# Altium PCB PCB2.PcbDoc (part 4 of 5)
Units mil, origin at the board's own origin, x right, y up, seen from the top; angles counter-clockwise.
Board outline 6000 x 4000 mil, 2 copper layers (Top Layer, Bottom Layer); 109 components, 117 nets, 490 pads, 96 vias.
Unrouted connection lines stored in the file: 3.
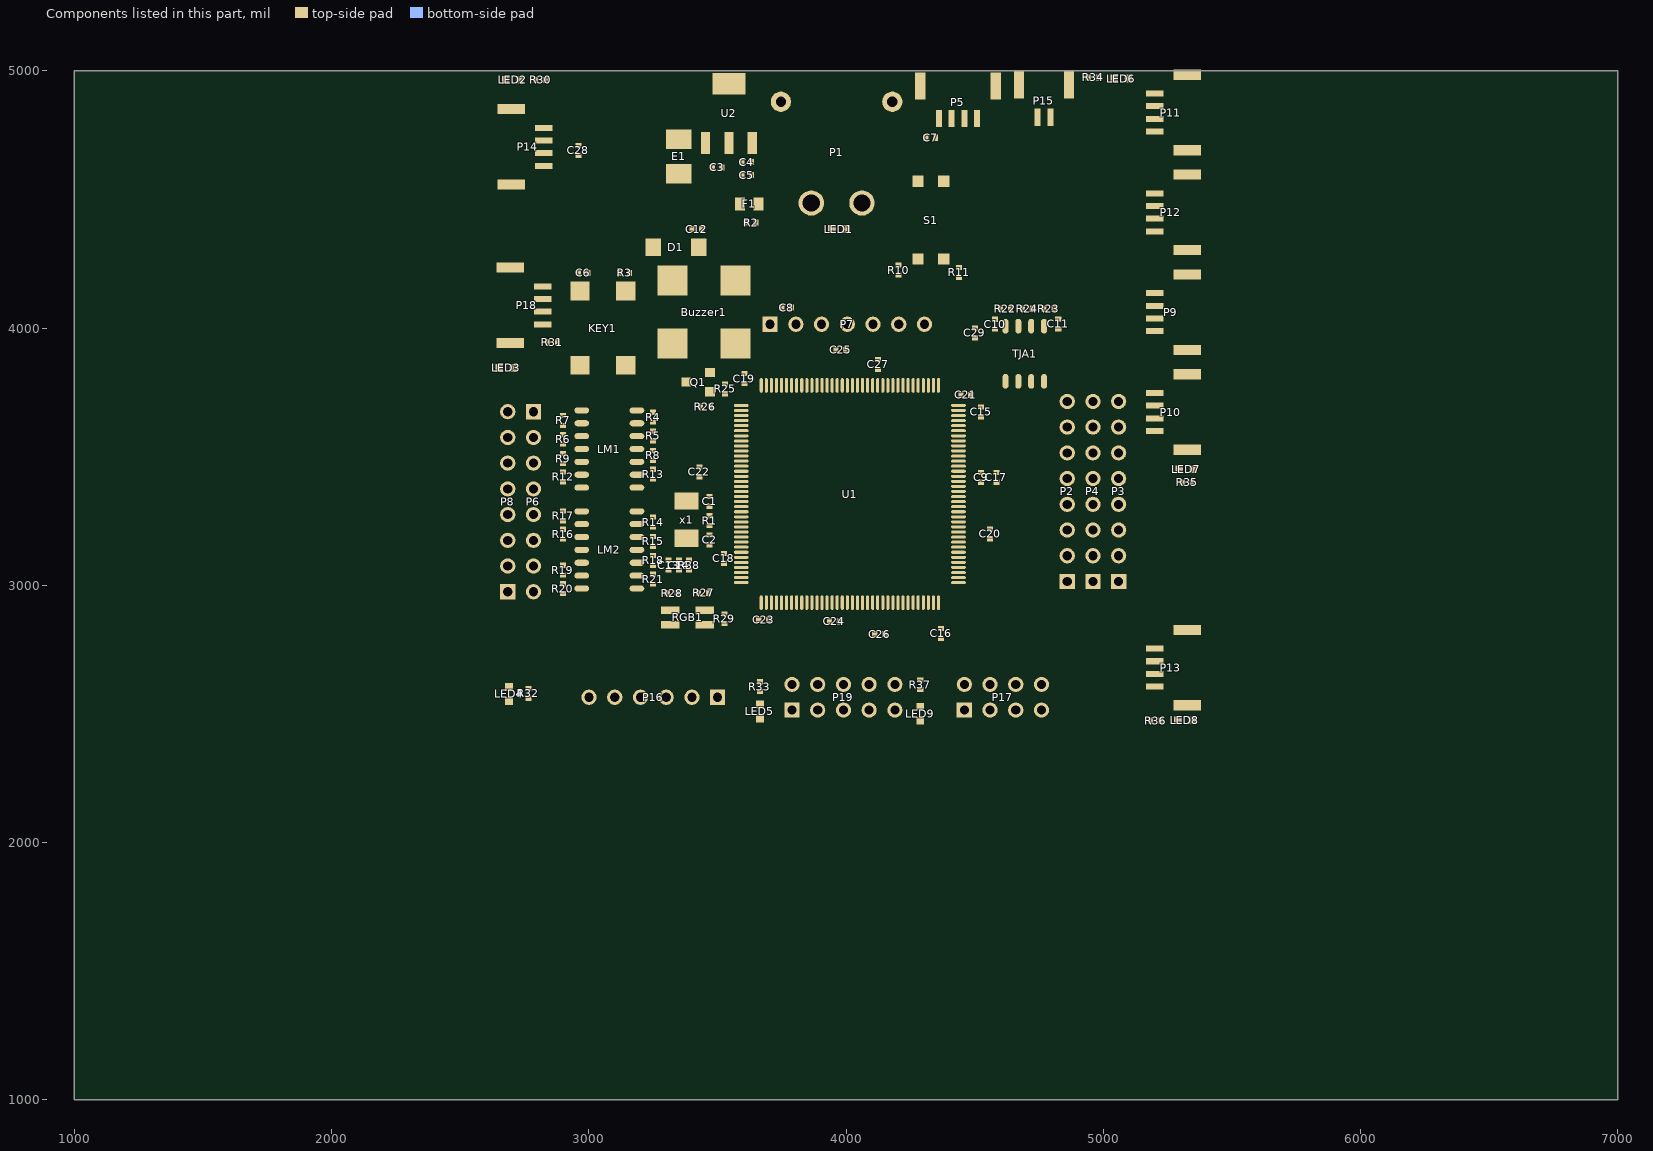
[diagram p4: the components of this part, seen from the top]

## Via types
v1: diameter 19.68, hole 11.81, Top Layer to Bottom Layer, tented both sides, 64 vias
v2: diameter 39, hole 30, Top Layer to Bottom Layer, tented both sides, 17 vias
v3: diameter 30, hole 20, Top Layer to Bottom Layer, tented both sides, 15 vias

## Nets (pads, with @x,y where several pads share a name; then routed paths per layer and width w, separated by ;. In a path a pad name is that pad's centre, name@x,y a point inside that pad or via, vN(x,y) a via of type N, cw(c..) or ccw(c..) an arc to the next point about the centre after c; other vN are vias at no path point) (continued)
copper on no net: (continued)
  Top Layer w1: 3881.33,2294 4133.67,2294 ; 3881.33,2295 4133.67,2295 ; 3882.33,2296 4132.67,2296 ; 3882.33,2297 4132.67,2297 ; 3882.33,2298 4131.67,2298 ; 3883.33,2299 4131.67,2299 ; 3883.33,2300 4130.67,2300 ; 3883.33,2301 4130.67,2301 ; 3883.33,2302 4129.67,2302 ; 3884.33,2303 4129.67,2303 ; 3884.33,2304 4128.67,2304 ; 3884.33,2305 4127.67,2305 ; 3884.33,2306 4127.67,2306 ; 3884.33,2307 4126.67,2307 ; 3885.33,2308 4125.67,2308 ; 3885.33,2309 4124.67,2309 ; 3885.33,2310 4124.67,2310 ; 3886.33,2311 4123.67,2311 ; 3886.33,2312 4122.67,2312 ; 3886.33,2313 4121.67,2313 ; 3886.33,2314 4120.67,2314 ; 3887.33,2315 4119.67,2315 ; 3887.33,2316 4118.67,2316 ; 3887.33,2317 4117.67,2317 ; 3887.33,2318 4116.67,2318 ; 3888.33,1961 3903.67,1961 ; 3888.33,2319 4115.67,2319 ; 3888.33,2320 4114.67,2320 ; 3888.33,2321 4113.67,2321 ; 3888.33,2322 4112.67,2322 ; 3889.33,1959 3903.67,1959 ; 3889.33,1960 3903.67,1960 ; 3889.33,1971 3903.67,1971 ; 3889.33,1972 3903.67,1972 ; 3889.33,1973 3903.67,1973 ; 3889.33,1974 3903.67,1974 ; 3889.33,1975 3903.67,1975 ; 3889.33,1976 3903.67,1976 ; 3889.33,1977 3903.67,1977 ; 3889.33,1978 3903.67,1978 ; 3889.33,1979 3903.67,1979 ; 3889.33,1989 3901.67,1989 ; 3889.33,2323 4111.67,2323 ; 3889.33,2324 4109.67,2324 ; 3889.33,2325 4108.67,2325 ; 3890.33,1990 3899.67,1990 ; 3890.33,2326 4107.67,2326 ; 3890.33,2327 4105.67,2327 ; 3890.33,2328 4103.67,2328 ; 3890.33,2329 4101.67,2329 ; 3891.33,1991 3897.67,1991 ; 3891.33,1992 3896.67,1992 ; 3891.33,2330 4099.67,2330 ; 3891.33,2331 4095.67,2331 ; 3892.33,1993 3894.67,1993 ; 3899.33,2027 3909.67,2027 ; 3900.33,2028 3907.67,2028 ; 3901.33,2029 3906.67,2029 ; 3902.33,1946 3915.67,1946 ; 3902.33,2030 3905.67,2030 ; 3902.33,2031 3903.67,2031 ; 3903.33,1947 3914.67,1947 ; 3904.33,1948 3913.67,1948 ; 3904.33,1949 3913.67,1949 ; 3905.33,1950 3912.67,1950 ; 3905.33,1951 3912.67,1951 ; 3905.33,1952 3912.67,1952 ; 3905.33,2005 3916.67,2005 ; 3906.33,1953 3912.67,1953 ; 3906.33,1954 3912.67,1954 ; 3906.33,1955 3912.67,1955 ; 3906.33,2006 3914.67,2006 ; 3907.33,1956 3912.67,1956 ; 3907.33,1957 3912.67,1957 ; 3907.33,1958 3912.67,1958 ; 3907.33,1959 3912.67,1959 ; 3907.33,2007 3913.67,2007 ; 3907.33,2008 3912.67,2008 ; 3908.33,1960 3908.67,1960 ; 3908.33,2009 3910.67,2009 ; 3909.33,2010 3909.67,2010 ; 3921.33,2064 3991.67,2064 ; 3921.33,2065 3991.67,2065 ; 3922.33,2066 3992.67,2066 ; 3922.33,2067 3992.67,2067 ; 3922.33,2068 3992.67,2068 ; 3922.33,2069 3992.67,2069 ; 3923.33,2070 3993.67,2070 ; 3923.33,2071 3993.67,2071 ; 3923.33,2072 3993.67,2072 ; 3924.33,2073 3993.67,2073 ; 3924.33,2074 3994.67,2074 ; 3924.33,2075 3994.67,2075 ; 3924.33,2076 3994.67,2076 ; 3925.33,2077 3994.67,2077 ; 3925.33,2078 3995.67,2078 ; 3925.33,2079 3995.67,2079 ; 3925.33,2080 3995.67,2080 ; 3926.33,2081 3996.67,2081 ; 3926.33,2082 3996.67,2082 ; 3926.33,2083 3996.67,2083 ; 3927.33,2084 3996.67,2084 ; 3927.33,2085 3997.67,2085 ; 3927.33,2086 3997.67,2086 ; 3927.33,2087 3997.67,2087 ; 3928.33,2088 3997.67,2088 ; 3928.33,2089 3998.67,2089 ; 3928.33,2090 3998.67,2090 ; 3928.33,2091 3998.67,2091 ; 3929.33,2092 3999.67,2092 ; 3929.33,2093 3999.67,2093 ; 3929.33,2094 3999.67,2094 ; 3929.33,2095 3999.67,2095 ; 3930.33,2096 4000.67,2096 ; 3930.33,2097 4000.67,2097 ; 3930.33,2098 4000.67,2098 ; 3931.33,1978 3967.67,1978 ; 3931.33,1979 3969.67,1979 ; 3931.33,2099 4000.67,2099 ; 3931.33,2100 4001.67,2100 ; 3931.33,2101 4001.67,2101 ; 3931.33,2102 4001.67,2102 ; 3932.33,1975 3963.67,1975 ; 3932.33,1976 3963.67,1976 ; 3932.33,1977 3965.67,1977 ; 3932.33,2103 4001.67,2103 ; 3932.33,2104 4002.67,2104 ; 3932.33,2105 4002.67,2105 ; 3932.33,2106 4002.67,2106 ; 3933.33,1972 3963.67,1972 ; 3933.33,1973 3963.67,1973 ; 3933.33,1974 3963.67,1974 ; 3933.33,2010 3977.67,2010 ; 3933.33,2011 4032.67,2011 ; 3933.33,2012 4033.67,2012 ; 3933.33,2107 4003.67,2107 ; 3933.33,2108 4003.67,2108 ; 3933.33,2109 4003.67,2109 ; 3934.33,1969 3946.67,1969 ; 3934.33,1970 3963.67,1970 ; 3934.33,1971 3963.67,1971 ; 3934.33,1980 3971.67,1980 ; 3934.33,2004 3976.67,2004 ; 3934.33,2005 3976.67,2005 ; 3934.33,2006 3977.67,2006 ; 3934.33,2007 3978.67,2007 ; 3934.33,2008 3978.67,2008 ; 3934.33,2009 3977.67,2009 ; 3934.33,2110 4003.67,2110 ; 3934.33,2111 4004.67,2111 ; 3934.33,2112 4004.67,2112 ; 3934.33,2113 4004.67,2113 ; 3935.33,1966 3939.67,1966 ; 3935.33,1967 3942.67,1967 ; 3935.33,1968 3944.67,1968 ; 3935.33,2002 3974.67,2002 ; 3935.33,2003 3975.67,2003 ; 3935.33,2114 4004.67,2114 ; 3935.33,2115 4005.67,2115 ; 3935.33,2116 4005.67,2116 ; 3935.33,2117 4005.67,2117 ; 3936.33,1939 3963.67,1939 ; 3936.33,1940 3963.67,1940 ; 3936.33,1941 3963.67,1941 ; 3936.33,1942 3963.67,1942 ; 3936.33,1943 3963.67,1943 ; 3936.33,1944 3963.67,1944 ; 3936.33,1965 3936.67,1965 ; 3936.33,2118 4006.67,2118 ; 3936.33,2119 4006.67,2119 ; 3936.33,2120 4006.67,2120 ; 3936.33,2121 4006.67,2121 ; 3937.33,1938 3962.67,1938 ; 3937.33,2122 4007.67,2122 ; 3937.33,2123 4007.67,2123 ; 3937.33,2124 4007.67,2124 ; 3938.33,2125 4007.67,2125 ; 3938.33,2126 4008.67,2126 ; 3938.33,2127 4008.67,2127 ; 3938.33,2128 4008.67,2128 ; 3939.33,1937 3962.67,1937 ; 3939.33,1981 3973.67,1981 ; 3939.33,2129 4008.67,2129 ; 3939.33,2130 4009.67,2130 ; 3939.33,2131 4009.67,2131 ; 3939.33,2132 4009.67,2132 ; 3940.33,2133 4010.67,2133 ; 3940.33,2134 4010.67,2134 ; 3940.33,2135 4010.67,2135 ; 3941.33,2136 4010.67,2136 ; 3941.33,2137 4011.67,2137 ; 3941.33,2138 4011.67,2138 ; 3941.33,2139 4011.67,2139 ; 3942.33,2140 4011.67,2140 ; 3942.33,2141 4012.67,2141 ; 3942.33,2142 4012.67,2142 ; 3942.33,2143 4012.67,2143 ; 3943.33,1936 3961.67,1936 ; 3943.33,2144 4013.67,2144 ; 3943.33,2145 4013.67,2145 ; 3943.33,2146 4013.67,2146 ; 3943.33,2147 4013.67,2147 ; 3944.33,1935 3961.67,1935 ; 3944.33,1945 3963.67,1945 ; 3944.33,1982 3973.67,1982 ; 3944.33,2148 4014.67,2148 ; 3944.33,2149 4014.67,2149 ; 3944.33,2150 4014.67,2150 ; 3945.33,1934 3960.67,1934 ; 3945.33,2151 4014.67,2151 ; 3945.33,2152 4015.67,2152 ; 3945.33,2153 4015.67,2153 ; 3945.33,2154 4015.67,2154 ; 3946.33,1930 3951.67,1930 ; 3946.33,1931 3955.67,1931 ; 3946.33,1932 3957.67,1932 ; 3946.33,1933 3959.67,1933 ; 3946.33,2155 4015.67,2155 ; 3946.33,2156 4016.67,2156 ; 3946.33,2157 4016.67,2157 ; 3946.33,2158 4016.67,2158 ; 3947.33,1946 3963.67,1946 ; 3947.33,2159 4017.67,2159 ; 3947.33,2160 4017.67,2160 ; 3947.33,2161 4017.67,2161 ; 3948.33,1947 3963.67,1947 ; 3948.33,1948 3963.67,1948 ; 3948.33,1950 3963.67,1950 ; 3948.33,1951 3963.67,1951 ; 3948.33,1952 3963.67,1952 ; 3948.33,1953 3963.67,1953 ; 3948.33,1954 3963.67,1954 ; 3948.33,1955 3963.67,1955 ; 3948.33,1956 3963.67,1956 ; 3948.33,1957 3963.67,1957 ; 3948.33,1958 3963.67,1958 ; 3948.33,1959 3963.67,1959 ; 3948.33,1960 3963.67,1960 ; 3948.33,1961 3963.67,1961 ; 3948.33,1962 3963.67,1962 ; 3948.33,1963 3963.67,1963 ; 3948.33,1964 3963.67,1964 ; 3948.33,1965 3963.67,1965 ; 3948.33,1966 3963.67,1966 ; 3948.33,1967 3963.67,1967 ; 3948.33,1968 3963.67,1968 ; 3948.33,1969 3963.67,1969 ; 3948.33,1983 3973.67,1983 ; 3948.33,1984 3973.67,1984 ; 3948.33,1985 3973.67,1985 ; 3948.33,1986 3973.67,1986 ; 3948.33,1987 3963.67,1987 ; 3948.33,1988 3963.67,1988 ; 3948.33,1989 3963.67,1989 ; 3948.33,1990 3963.67,1990 ; 3948.33,1991 3963.67,1991 ; 3948.33,1992 3963.67,1992 ; 3948.33,1993 3963.67,1993 ; 3948.33,1994 3963.67,1994 ; 3948.33,1995 3963.67,1995 ; 3948.33,1996 3963.67,1996 ; 3948.33,1997 3963.67,1997 ; 3948.33,1998 3963.67,1998 ; 3948.33,1999 3963.67,1999 ; 3948.33,2000 3963.67,2000 ; 3948.33,2001 3963.67,2001 ; 3948.33,2013 3963.67,2013 ; 3948.33,2014 3963.67,2014 ; 3948.33,2015 3963.67,2015 ; 3948.33,2016 3963.67,2016 ; 3948.33,2017 3963.67,2017 ; 3948.33,2018 3963.67,2018 ; 3948.33,2019 3963.67,2019 ; 3948.33,2020 3963.67,2020 ; 3948.33,2021 3963.67,2021 ; 3948.33,2022 3963.67,2022 ; 3948.33,2023 3963.67,2023 ; 3948.33,2024 3963.67,2024 ; 3948.33,2025 3963.67,2025 ; 3948.33,2026 3963.67,2026 ; 3948.33,2027 3963.67,2027 ; 3948.33,2028 3963.67,2028 ; 3948.33,2029 3963.67,2029 ; 3948.33,2030 3963.67,2030 ; 3948.33,2031 3963.67,2031 ; 3948.33,2032 3963.67,2032 ; 3948.33,2033 3963.67,2033 ; 3948.33,2034 3963.67,2034 ; 3948.33,2035 3963.67,2035 ; 3948.33,2036 3963.67,2036 ; 3948.33,2037 3963.67,2037 ; 3948.33,2162 4017.67,2162 ; 3948.33,2163 4018.67,2163 ; 3948.33,2164 4018.67,2164 ; 3948.33,2165 4018.67,2165 ; 3949.33,1949 3963.67,1949 ; 3949.33,2166 4018.67,2166 ; 3949.33,2167 4019.67,2167 ; 3949.33,2168 4019.67,2168 ; 3949.33,2169 4019.67,2169 ; 3950.33,2170 4020.67,2170 ; 3950.33,2171 4020.67,2171 ; 3950.33,2172 4020.67,2172 ; 3950.33,2173 4020.67,2173 ; 3950.33,2274 4045.67,2274 ; 3951.33,2174 4021.67,2174 ; 3951.33,2175 4021.67,2175 ; 3951.33,2176 4021.67,2176 ; 3952.33,2177 4021.67,2177 ; 3952.33,2178 4022.67,2178 ; 3952.33,2179 4022.67,2179 ; 3952.33,2180 4022.67,2180 ; 3953.33,2181 4022.67,2181 ; 3953.33,2182 4023.67,2182 ; 3953.33,2183 4023.67,2183 ; 3953.33,2184 4023.67,2184 ; 3953.33,2273 4045.67,2273 ; 3954.33,2185 4024.67,2185 ; 3954.33,2186 4024.67,2186 ; 3954.33,2187 4024.67,2187 ; 3954.33,2188 4024.67,2188 ; 3955.33,2189 4025.67,2189 ; 3955.33,2190 4025.67,2190 ; 3955.33,2191 4025.67,2191 ; 3955.33,2272 4045.67,2272 ; 3956.33,2192 4025.67,2192 ; 3956.33,2193 4026.67,2193 ; 3956.33,2194 4026.67,2194 ; 3956.33,2195 4026.67,2195 ; 3957.33,2196 4026.67,2196 ; 3957.33,2197 4027.67,2197 ; 3957.33,2198 4027.67,2198 ; 3957.33,2199 4027.67,2199 ; 3957.33,2271 4045.67,2271 ; 3958.33,2200 4028.67,2200 ; 3958.33,2201 4028.67,2201 ; 3958.33,2202 4028.67,2202 ; 3958.33,2270 4045.67,2270 ; 3959.33,2203 4028.67,2203 ; 3959.33,2204 4029.67,2204 ; 3959.33,2205 4029.67,2205 ; 3959.33,2206 4029.67,2206 ; 3960.33,2207 4029.67,2207 ; 3960.33,2208 4030.67,2208 ; 3960.33,2209 4030.67,2209 ; 3960.33,2210 4030.67,2210 ; 3960.33,2269 4045.67,2269 ; 3961.33,2211 4031.67,2211 ; 3961.33,2212 4031.67,2212 ; 3961.33,2213 4031.67,2213 ; 3961.33,2214 4031.67,2214 ; 3961.33,2268 4045.67,2268 ; 3962.33,2215 4032.67,2215 ; 3962.33,2216 4032.67,2216 ; 3962.33,2217 4032.67,2217 ; 3962.33,2267 4045.67,2267 ; 3963.33,2218 4032.67,2218 ; 3963.33,2219 4033.67,2219 ; 3963.33,2220 4033.67,2220 ; 3963.33,2221 4033.67,2221 ; 3964.33,2222 4033.67,2222 ; 3964.33,2223 4034.67,2223 ; 3964.33,2224 4034.67,2224 ; 3964.33,2225 4034.67,2225 ; 3964.33,2265 4045.67,2265 ; 3964.33,2266 4045.67,2266 ; 3965.33,1987 3972.67,1987 ; 3965.33,2013 4033.67,2013 ; 3965.33,2226 4035.67,2226 ; 3965.33,2227 4035.67,2227 ; 3965.33,2228 4035.67,2228 ; 3965.33,2264 4044.67,2264 ; 3966.33,1935 3986.67,1935 ; 3966.33,2014 3971.67,2014 ; 3966.33,2015 3970.67,2015 ; 3966.33,2229 4035.67,2229 ; 3966.33,2230 4036.67,2230 ; 3966.33,2231 4036.67,2231 ; 3966.33,2232 4036.67,2232 ; 3966.33,2263 4044.67,2263 ; 3967.33,1934 3984.67,1934 ; 3967.33,1936 3988.67,1936 ; 3967.33,2016 3968.67,2016 ; 3967.33,2233 4036.67,2233 ; 3967.33,2234 4037.67,2234 ; 3967.33,2235 4037.67,2235 ; 3967.33,2236 4037.67,2236 ; 3967.33,2261 4044.67,2261 ; 3967.33,2262 4044.67,2262 ; 3968.33,1932 3979.67,1932 ; 3968.33,1933 3982.67,1933 ; 3968.33,2237 4038.67,2237 ; 3968.33,2238 4038.67,2238 ; 3968.33,2239 4038.67,2239 ; 3968.33,2240 4038.67,2240 ; 3968.33,2259 4043.67,2259 ; 3968.33,2260 4044.67,2260 ; 3969.33,1931 3976.67,1931 ; 3969.33,1937 3990.67,1937 ; 3969.33,1988 3972.67,1988 ; 3969.33,2241 4039.67,2241 ; 3969.33,2242 4039.67,2242 ; 3969.33,2243 4039.67,2243 ; 3969.33,2257 4043.67,2257 ; 3969.33,2258 4043.67,2258 ; 3970.33,1929 3970.67,1929 ; 3970.33,1930 3973.67,1930 ; 3970.33,2244 4039.67,2244 ; 3970.33,2245 4040.67,2245 ; 3970.33,2246 4040.67,2246 ; 3970.33,2247 4040.67,2247 ; 3970.33,2253 4042.67,2253 ; 3970.33,2254 4042.67,2254 ; 3970.33,2255 4042.67,2255 ; 3970.33,2256 4043.67,2256 ; 3971.33,1938 3992.67,1938 ; 3971.33,2248 4040.67,2248 ; 3971.33,2249 4041.67,2249 ; 3971.33,2250 4041.67,2250 ; 3971.33,2251 4041.67,2251 ; 3971.33,2252 4042.67,2252 ; 3972.33,2020 4034.67,2020 ; 3972.33,2021 4032.67,2021 ; 3973.33,1939 3994.67,1939 ; 3973.33,2014 4034.67,2014 ; 3973.33,2015 4035.67,2015 ; 3973.33,2016 4035.67,2016 ; 3973.33,2017 4036.67,2017 ; 3973.33,2018 4036.67,2018 ; 3973.33,2019 4035.67,2019 ; 3975.33,1940 3995.67,1940 ; 3975.33,1992 4030.67,1992 ; 3975.33,1993 4028.67,1993 ; 3975.33,1994 4027.67,1994 ; 3976.33,1941 3997.67,1941 ; 3976.33,1986 4030.67,1986 ; 3976.33,1987 4030.67,1987 ; 3976.33,1988 4031.67,1988 ; 3976.33,1989 4032.67,1989 ; 3976.33,1990 4032.67,1990 ; 3976.33,1991 4031.67,1991 ; 3977.33,1984 4028.67,1984 ; 3977.33,1985 4029.67,1985 ; 3978.33,1942 3998.67,1942 ; 3980.33,1943 4000.67,1943 ; 3981.33,1944 4001.67,1944 ; 3982.33,1983 3993.67,1983 ; 3983.33,1945 4038.67,1945 ; 3983.33,1979 3994.67,1979 ; 3983.33,1980 3994.67,1980 ; 3983.33,1981 3993.67,1981 ; 3983.33,1982 3993.67,1982 ; 3984.33,1946 4039.67,1946 ; 3984.33,1976 3996.67,1976 ; 3984.33,1977 3995.67,1977 ; 3984.33,1978 3995.67,1978 ; 3985.33,1973 3998.67,1973 ; 3985.33,1974 3997.67,1974 ; 3985.33,1975 3996.67,1975 ; 3986.33,1947 4037.67,1947 ; 3986.33,1970 4000.67,1970 ; 3986.33,1971 3999.67,1971 ; 3986.33,1972 3998.67,1972 ; 3987.33,1948 4034.67,1948 ; 3987.33,1968 4001.67,1968 ; 3987.33,1969 4000.67,1969 ; 3988.33,1949 4031.67,1949 ; 3988.33,1965 4019.67,1965 ; 3988.33,1966 4020.67,1966 ; 3988.33,1967 4002.67,1967 ; 3989.33,1963 4018.67,1963 ; 3989.33,1964 4019.67,1964 ; 3990.33,1950 4029.67,1950 ; 3990.33,1961 4017.67,1961 ; 3990.33,1962 4017.67,1962 ; 3991.33,1951 4026.67,1951 ; 3991.33,1959 4015.67,1959 ; 3991.33,1960 4016.67,1960 ; 3992.33,1952 4024.67,1952 ; 3992.33,1958 4015.67,1958 ; 3993.33,1953 4022.67,1953 ; 3993.33,1956 4016.67,1956 ; 3993.33,1957 4014.67,1957 ; 3994.33,1954 4020.67,1954 ; 3994.33,1955 4018.67,1955 ; 3995.33,1995 4010.67,1995 ; 3995.33,1996 4009.67,1996 ; 3995.33,1997 4009.67,1997 ; 3995.33,1998 4009.67,1998 ; 3995.33,1999 4009.67,1999 ; 3995.33,2000 4009.67,2000 ; 3995.33,2001 4009.67,2001 ; 3995.33,2002 4009.67,2002 ; 3995.33,2003 4009.67,2003 ; 3995.33,2004 4009.67,2004 ; 3995.33,2005 4009.67,2005 ; 3995.33,2006 4009.67,2006 ; 3995.33,2007 4009.67,2007 ; 3995.33,2008 4009.67,2008 ; 3995.33,2009 4009.67,2009 ; 3995.33,2010 4009.67,2010 ; 3995.33,2022 4009.67,2022 ; 3995.33,2023 4009.67,2023 ; 3995.33,2024 4009.67,2024 ; 3995.33,2025 4009.67,2025 ; 3995.33,2026 4009.67,2026 ; 3995.33,2027 4009.67,2027 ; 3995.33,2028 4009.67,2028 ; 3995.33,2029 4009.67,2029 ; 3995.33,2030 4009.67,2030 ; 3995.33,2031 4009.67,2031 ; 3995.33,2032 4009.67,2032 ; 3995.33,2033 4009.67,2033 ; 3995.33,2034 4009.67,2034 ; 3995.33,2035 4009.67,2035 ; 3995.33,2036 4009.67,2036 ; 3995.33,2037 4009.67,2037 ; 4004.33,1944 4037.67,1944 ; 4004.33,1967 4020.67,1967 ; 4005.33,1943 4036.67,1943 ; 4005.33,1968 4021.67,1968 ; 4005.33,1969 4021.67,1969 ; 4006.33,1942 4036.67,1942 ; 4006.33,1970 4022.67,1970 ; 4007.33,1971 4022.67,1971 ; 4007.33,1972 4023.67,1972 ; 4008.33,1941 4035.67,1941 ; 4008.33,1973 4023.67,1973 ; 4008.33,1974 4024.67,1974 ; 4009.33,1940 4034.67,1940 ; 4009.33,1975 4024.67,1975 ; 4009.33,1976 4025.67,1976 ; 4009.33,1977 4025.67,1977 ; 4010.33,1939 4033.67,1939 ; 4010.33,1978 4026.67,1978 ; 4010.33,1979 4026.67,1979 ; 4011.33,1980 4027.67,1980 ; 4011.33,1981 4027.67,1981 ; 4011.33,1982 4027.67,1982 ; 4012.33,1938 4032.67,1938 ; 4012.33,1983 4028.67,1983 ; 4013.33,1937 4031.67,1937 ; 4013.33,1995 4025.67,1995 ; 4014.33,1996 4024.67,1996 ; 4014.33,1997 4023.67,1997 ; 4015.33,1936 4031.67,1936 ; 4015.33,1998 4021.67,1998 ; 4016.33,1935 4030.67,1935 ; 4016.33,1999 4020.67,1999 ; 4016.33,2000 4018.67,2000 ; 4017.33,2001 4017.67,2001 ; 4018.33,1934 4029.67,1934 ; 4020.33,1933 4028.67,1933 ; 4021.33,2022 4031.67,2022 ; 4022.33,1932 4028.67,1932 ; 4022.33,2023 4030.67,2023 ; 4023.33,2024 4028.67,2024 ; 4023.33,2025 4027.67,2025 ; 4024.33,1931 4027.67,1931 ; 4024.33,2026 4025.67,2026 ; 4024.33,2027 4024.67,2027 ; 4025.33,1930 4026.67,1930 ; 4046.33,1960 4055.67,1960 ; 4047.33,1959 4054.67,1959 ; 4047.33,1961 4056.67,1961 ; 4047.33,1962 4056.67,1962 ; 4048.33,1963 4057.67,1963 ; 4048.33,1964 4058.67,1964 ; 4049.33,1958 4053.67,1958 ; 4049.33,1965 4058.67,1965 ; 4049.33,1966 4059.67,1966 ; 4049.33,2005 4094.67,2005 ; 4049.33,2006 4095.67,2006 ; 4049.33,2007 4095.67,2007 ; 4049.33,2008 4094.67,2008 ; 4049.33,2009 4093.67,2009 ; 4049.33,2010 4092.67,2010 ; 4049.33,2011 4090.67,2011 ; 4050.33,1967 4060.67,1967 ; 4050.33,1968 4060.67,1968 ; 4050.33,2002 4092.67,2002 ; 4050.33,2003 4093.67,2003 ; 4050.33,2004 4094.67,2004 ; 4051.33,1957 4053.67,1957 ; 4051.33,1969 4061.67,1969 ; 4051.33,1970 4062.67,1970 ; 4052.33,1956 4052.67,1956 ; 4052.33,1971 4062.67,1971 ; 4052.33,1972 4063.67,1972 ; 4053.33,1973 4079.67,1973 ; 4053.33,1974 4079.67,1974 ; 4054.33,1975 4079.67,1975 ; 4054.33,1976 4079.67,1976 ; 4054.33,1977 4079.67,1977 ; 4055.33,1978 4079.67,1978 ; 4055.33,1979 4079.67,1979 ; 4056.33,1980 4079.67,1980 ; 4056.33,1981 4079.67,1981 ; 4056.33,1982 4079.67,1982 ; 4057.33,1983 4079.67,1983 ; 4057.33,1984 4094.67,1984 ; 4057.33,1985 4092.67,1985 ; 4058.33,1986 4091.67,1986 ; 4058.33,1987 4090.67,1987 ; 4059.33,1988 4089.67,1988 ; 4059.33,1989 4088.67,1989 ; 4059.33,1990 4087.67,1990 ; 4059.33,1991 4086.67,1991 ; 4060.33,1992 4084.67,1992 ; 4060.33,1993 4083.67,1993 ; 4060.33,1994 4082.67,1994 ; 4061.33,1995 4081.67,1995 ; 4061.33,1996 4079.67,1996 ; 4061.33,1997 4079.67,1997 ; 4061.33,1998 4079.67,1998 ; 4062.33,1999 4079.67,1999 ; 4062.33,2000 4079.67,2000 ; 4062.33,2001 4079.67,2001 ; 4064.33,2012 4079.67,2012 ; 4065.33,1930 4079.67,1930 ; 4065.33,1931 4079.67,1931 ; 4065.33,1932 4079.67,1932 ; 4065.33,1933 4079.67,1933 ; 4065.33,1934 4079.67,1934 ; 4065.33,1935 4091.67,1935 ; 4065.33,1936 4079.67,1936 ; 4065.33,1937 4079.67,1937 ; 4065.33,1938 4079.67,1938 ; 4065.33,1939 4079.67,1939 ; 4065.33,1940 4079.67,1940 ; 4065.33,1941 4079.67,1941 ; 4065.33,1942 4079.67,1942 ; 4065.33,1943 4079.67,1943 ; 4065.33,1944 4079.67,1944 ; 4065.33,1945 4079.67,1945 ; 4065.33,1946 4079.67,1946 ; 4065.33,1947 4079.67,1947 ; 4065.33,1948 4079.67,1948 ; 4065.33,1949 4079.67,1949 ; 4065.33,1950 4079.67,1950 ; 4065.33,1951 4079.67,1951 ; 4065.33,1952 4079.67,1952 ; 4065.33,1953 4079.67,1953 ; 4065.33,1954 4079.67,1954 ; 4065.33,1955 4079.67,1955 ; 4065.33,1956 4079.67,1956 ; 4065.33,1957 4079.67,1957 ; 4065.33,1958 4079.67,1958 ; 4065.33,1959 4079.67,1959 ; 4065.33,1960 4079.67,1960 ; 4065.33,1961 4079.67,1961 ; 4065.33,1962 4079.67,1962 ; 4065.33,1963 4079.67,1963 ; 4065.33,1964 4079.67,1964 ; 4065.33,1965 4079.67,1965 ; 4065.33,1966 4079.67,1966 ; 4065.33,1967 4079.67,1967 ; 4065.33,1968 4079.67,1968 ; 4065.33,1969 4079.67,1969 ; 4065.33,1970 4079.67,1970 ; 4065.33,1971 4079.67,1971 ; 4065.33,1972 4079.67,1972 ; 4065.33,2013 4079.67,2013 ; 4065.33,2014 4079.67,2014 ; 4065.33,2015 4079.67,2015 ; 4065.33,2016 4079.67,2016 ; 4065.33,2017 4079.67,2017 ; 4065.33,2018 4079.67,2018 ; 4065.33,2019 4079.67,2019 ; 4065.33,2020 4079.67,2020 ; 4065.33,2021 4079.67,2021 ; 4065.33,2022 4079.67,2022 ; 4065.33,2023 4079.67,2023 ; 4065.33,2024 4079.67,2024 ; 4065.33,2025 4079.67,2025 ; 4065.33,2026 4079.67,2026 ; 4065.33,2027 4079.67,2027 ; 4065.33,2028 4079.67,2028 ; 4065.33,2029 4079.67,2029 ; 4065.33,2030 4079.67,2030 ; 4065.33,2031 4079.67,2031 ; 4065.33,2032 4079.67,2032 ; 4065.33,2033 4079.67,2033 ; 4065.33,2034 4079.67,2034 ; 4065.33,2035 4079.67,2035 ; 4065.33,2036 4079.67,2036 ; 4081.33,1934 4090.67,1934 ; 4081.33,1936 4092.67,1936 ; 4081.33,1982 4095.67,1982 ; 4081.33,1983 4094.67,1983 ; 4081.33,2012 4089.67,2012 ; 4082.33,1937 4093.67,1937 ; 4082.33,1938 4094.67,1938 ; 4082.33,1980 4094.67,1980 ; 4082.33,1981 4094.67,1981 ; 4082.33,2013 4088.67,2013 ; 4082.33,2014 4087.67,2014 ; 4083.33,1933 4089.67,1933 ; 4083.33,1939 4095.67,1939 ; 4083.33,1978 4092.67,1978 ; 4083.33,1979 4093.67,1979 ; 4083.33,2015 4086.67,2015 ; 4084.33,1932 4088.67,1932 ; 4084.33,1940 4096.67,1940 ; 4084.33,1975 4090.67,1975 ; 4084.33,1976 4091.67,1976 ; 4084.33,1977 4092.67,1977 ; 4084.33,2016 4085.67,2016 ; 4085.33,1941 4096.67,1941 ; 4085.33,1942 4097.67,1942 ; 4085.33,1973 4088.67,1973 ; 4085.33,1974 4089.67,1974 ; 4086.33,1931 4087.67,1931 ; 4086.33,1943 4098.67,1943 ; 4086.33,1944 4099.67,1944 ; 4086.33,1972 4087.67,1972 ; 4087.33,1945 4099.67,1945 ; 4088.33,1946 4100.67,1946 ; 4088.33,1947 4101.67,1947 ; 4089.33,1948 4101.67,1948 ; 4089.33,1949 4102.67,1949 ; 4090.33,1950 4102.67,1950 ; 4090.33,1951 4103.67,1951 ; 4091.33,1952 4103.67,1952 ; 4091.33,1953 4104.67,1953 ; 4091.33,1954 4104.67,1954 ; 4092.33,1955 4105.67,1955 ; 4092.33,1956 4105.67,1956 ; 4092.33,1957 4106.67,1957 ; 4093.33,1958 4106.67,1958 ; 4093.33,1959 4106.67,1959 ; 4093.33,1960 4107.67,1960 ; 4094.33,1961 4107.67,1961 ; 4094.33,1962 4107.67,1962 ; 4094.33,1963 4108.67,1963 ; 4095.33,1964 4108.67,1964 ; 4095.33,1965 4108.67,1965 ; 4095.33,1966 4109.67,1966 ; 4095.33,1967 4109.67,1967 ; 4095.33,1968 4109.67,1968 ; 4096.33,1969 4109.67,1969 ; 4096.33,1970 4110.67,1970 ; 4096.33,1971 4110.67,1971 ; 4096.33,1972 4110.67,1972 ; 4096.33,1973 4110.67,1973 ; 4096.33,1974 4110.67,1974 ; 4097.33,1975 4110.67,1975 ; 4097.33,1976 4111.67,1976 ; 4097.33,1977 4111.67,1977 ; 4097.33,1978 4111.67,1978 ; 4097.33,1979 4111.67,1979 ; 4097.33,1980 4111.67,1980 ; 4097.33,1981 4111.67,1981 ; 4097.33,1982 4111.67,1982 ; 4097.33,1983 4111.67,1983 ; 4097.33,1984 4111.67,1984 ; 4097.33,1985 4111.67,1985 ; 4097.33,1986 4111.67,1986 ; 4097.33,1987 4111.67,1987 ; 4097.33,1988 4111.67,1988 ; 4097.33,1989 4111.67,1989 ; 4097.33,1990 4111.67,1990 ; 4097.33,1991 4111.67,1991 ; 4097.33,1992 4111.67,1992 ; 4097.33,1993 4111.67,1993 ; 4097.33,1994 4111.67,1994 ; 4097.33,1995 4111.67,1995 ; 4097.33,1996 4111.67,1996 ; 4097.33,1997 4111.67,1997 ; 4097.33,1998 4111.67,1998 ; 4097.33,1999 4111.67,1999 ; 4097.33,2000 4111.67,2000 ; 4097.33,2001 4111.67,2001 ; 4097.33,2002 4111.67,2002 ; 4097.33,2003 4111.67,2003 ; 4097.33,2004 4111.67,2004 ; 4097.33,2005 4111.67,2005 ; 4097.33,2006 4111.67,2006 ; 4097.33,2007 4111.67,2007 ; 4097.33,2008 4111.67,2008 ; 4097.33,2009 4111.67,2009 ; 4097.33,2010 4111.67,2010 ; 4097.33,2011 4111.67,2011 ; 4097.33,2012 4111.67,2012 ; 4097.33,2013 4111.67,2013 ; 4097.33,2014 4111.67,2014 ; 4097.33,2015 4111.67,2015 ; 4097.33,2016 4111.67,2016 ; 4097.33,2017 4111.67,2017 ; 4097.33,2018 4111.67,2018 ; 4097.33,2019 4112.67,2019 ; 4097.33,2020 4139.67,2020 ; 4097.33,2021 4139.67,2021 ; 4097.33,2022 4140.67,2022 ; 4097.33,2023 4141.67,2023 ; 4097.33,2024 4142.67,2024 ; 4097.33,2025 4142.67,2025 ; 4097.33,2026 4140.67,2026 ; 4097.33,2027 4139.67,2027 ; 4097.33,2028 4137.67,2028 ; 4097.33,2029 4136.67,2029 ; 4097.33,2030 4112.67,2030 ; 4097.33,2031 4111.67,2031 ; 4097.33,2032 4111.67,2032 ; 4098.33,2033 4111.67,2033 ; 4123.33,1944 4156.67,1944 ; 4123.33,1945 4157.67,1945 ; 4123.33,1946 4157.67,1946 ; 4123.33,1947 4157.67,1947 ; 4123.33,1948 4157.67,1948 ; 4123.33,1949 4157.67,1949 ; 4123.33,1950 4139.67,1950 ; 4123.33,1951 4138.67,1951 ; 4123.33,1952 4138.67,1952 ; 4123.33,1953 4138.67,1953 ; 4123.33,1954 4138.67,1954 ; 4123.33,1955 4138.67,1955 ; 4123.33,1956 4138.67,1956 ; 4123.33,1957 4138.67,1957 ; 4123.33,1958 4138.67,1958 ; 4123.33,1959 4138.67,1959 ; 4123.33,1960 4138.67,1960 ; 4123.33,1961 4138.67,1961 ; 4123.33,1962 4138.67,1962 ; 4123.33,1963 4138.67,1963 ; 4123.33,1964 4138.67,1964 ; 4123.33,1965 4138.67,1965 ; 4123.33,1966 4138.67,1966 ; 4123.33,1967 4138.67,1967 ; 4123.33,1968 4138.67,1968 ; 4123.33,1969 4138.67,1969 ; 4123.33,1970 4138.67,1970 ; 4123.33,1971 4138.67,1971 ; 4123.33,1972 4138.67,1972 ; 4123.33,1973 4138.67,1973 ; 4123.33,1974 4138.67,1974 ; 4123.33,1975 4138.67,1975 ; 4123.33,1976 4138.67,1976 ; 4123.33,1977 4138.67,1977 ; 4123.33,1978 4138.67,1978 ; 4123.33,1979 4138.67,1979 ; 4123.33,1980 4138.67,1980 ; 4123.33,1981 4138.67,1981 ; 4123.33,1982 4138.67,1982 ; 4123.33,1983 4138.67,1983 ; 4123.33,1984 4138.67,1984 ; 4123.33,1985 4138.67,1985 ; 4123.33,1986 4138.67,1986 ; 4123.33,1987 4138.67,1987 ; 4123.33,1988 4138.67,1988 ; 4123.33,1989 4138.67,1989 ; 4123.33,1990 4138.67,1990 ; 4123.33,1991 4138.67,1991 ; 4123.33,1992 4138.67,1992 ; 4123.33,1993 4138.67,1993 ; 4123.33,1994 4138.67,1994 ; 4123.33,1995 4138.67,1995 ; 4123.33,1996 4138.67,1996 ; 4123.33,1997 4138.67,1997 ; 4123.33,1998 4138.67,1998 ; 4123.33,1999 4138.67,1999 ; 4123.33,2000 4138.67,2000 ; 4123.33,2001 4138.67,2001 ; 4123.33,2002 4138.67,2002 ; 4123.33,2003 4138.67,2003 ; 4123.33,2004 4138.67,2004 ; 4123.33,2005 4138.67,2005 ; 4123.33,2006 4138.67,2006 ; 4123.33,2007 4138.67,2007 ; 4123.33,2008 4138.67,2008 ; 4123.33,2009 4138.67,2009 ; 4123.33,2010 4138.67,2010 ; 4123.33,2011 4138.67,2011 ; 4123.33,2012 4138.67,2012 ; 4123.33,2013 4138.67,2013 ; 4123.33,2014 4138.67,2014 ; 4123.33,2015 4138.67,2015 ; 4123.33,2016 4138.67,2016 ; 4123.33,2017 4138.67,2017 ; 4123.33,2018 4138.67,2018 ; 4123.33,2019 4138.67,2019 ; 4123.33,2030 4134.67,2030 ; 4124.33,1941 4155.67,1941 ; 4124.33,1942 4156.67,1942 ; 4124.33,1943 4156.67,1943 ; 4124.33,2031 4133.67,2031 ; 4125.33,1939 4154.67,1939 ; 4125.33,1940 4155.67,1940 ; 4125.33,2032 4131.67,2032 ; 4126.33,1937 4152.67,1937 ; 4126.33,1938 4153.67,1938 ; 4126.33,2033 4130.67,2033 ; 4127.33,2034 4128.67,2034 ; 4128.33,1936 4151.67,1936 ; 4129.33,1935 4150.67,1935 ; 4133.33,1934 4147.67,1934 ; 4144.33,1950 4155.67,1950 ; 4145.33,1951 4154.67,1951 ; 4145.33,1952 4153.67,1952 ; 4145.33,1953 4153.67,1953 ; 4145.33,1954 4153.67,1954 ; 4146.33,1955 4152.67,1955 ; 4146.33,1956 4152.67,1956 ; 4146.33,1957 4152.67,1957 ; 4146.33,1958 4152.67,1958 ; 4146.33,1959 4152.67,1959 ; 4146.33,1960 4152.67,1960 ; 4147.33,1961 4152.67,1961 ; 4147.33,1962 4152.67,1962 ; 4147.33,1963 4148.67,1963 ; 4149.33,2063 4215.67,2063 ; 4149.33,2064 4216.67,2064 ; 4149.33,2065 4216.67,2065 ; 4149.33,2066 4217.67,2066 ; 4149.33,2067 4217.67,2067 ; 4150.33,2068 4217.67,2068 ; 4150.33,2069 4217.67,2069 ; 4150.33,2070 4218.67,2070 ; 4151.33,2071 4218.67,2071 ; 4151.33,2072 4218.67,2072 ; 4151.33,2073 4218.67,2073 ; 4151.33,2074 4219.67,2074 ; 4152.33,2075 4219.67,2075 ; 4152.33,2076 4219.67,2076 ; 4152.33,2077 4219.67,2077 ; 4152.33,2078 4220.67,2078 ; 4153.33,2079 4220.67,2079 ; 4153.33,2080 4220.67,2080 ; 4153.33,2081 4221.67,2081 ; 4154.33,2082 4221.67,2082 ; 4154.33,2083 4221.67,2083 ; 4154.33,2084 4221.67,2084 ; 4154.33,2085 4222.67,2085 ; 4155.33,2086 4222.67,2086 ; 4155.33,2087 4222.67,2087 ; 4155.33,2088 4222.67,2088 ; 4155.33,2089 4223.67,2089 ; 4156.33,2090 4223.67,2090 ; 4156.33,2091 4223.67,2091 ; 4156.33,2092 4224.67,2092 ; 4156.33,2093 4224.67,2093 ; 4157.33,2094 4224.67,2094 ; 4157.33,2095 4224.67,2095 ; 4157.33,2096 4225.67,2096 ; 4158.33,2097 4225.67,2097 ; 4158.33,2098 4225.67,2098 ; 4158.33,2099 4225.67,2099 ; 4158.33,2100 4226.67,2100 ; 4159.33,2101 4226.67,2101 ; 4159.33,2102 4226.67,2102 ; 4159.33,2103 4226.67,2103 ; 4159.33,2104 4227.67,2104 ; 4160.33,2105 4227.67,2105 ; 4160.33,2106 4227.67,2106 ; 4160.33,2107 4228.67,2107 ; 4160.33,2108 4228.67,2108 ; 4161.33,2109 4228.67,2109 ; 4161.33,2110 4228.67,2110 ; 4161.33,2111 4229.67,2111 ; 4162.33,2112 4229.67,2112 ; 4162.33,2113 4229.67,2113 ; 4162.33,2114 4229.67,2114 ; 4162.33,2115 4230.67,2115 ; 4163.33,2116 4230.67,2116 ; 4163.33,2117 4230.67,2117 ; 4163.33,2118 4231.67,2118 ; 4163.33,2119 4231.67,2119 ; 4164.33,2120 4231.67,2120 ; 4164.33,2121 4231.67,2121 ; 4164.33,2122 4232.67,2122 ; 4165.33,2123 4232.67,2123 ; 4165.33,2124 4232.67,2124 ; 4165.33,2125 4232.67,2125 ; 4165.33,2126 4233.67,2126 ; 4166.33,2127 4233.67,2127 ; 4166.33,2128 4233.67,2128 ; 4166.33,2129 4233.67,2129 ; 4166.33,2130 4234.67,2130 ; 4167.33,1967 4191.67,1967 ; 4167.33,1968 4194.67,1968 ; 4167.33,1969 4197.67,1969 ; 4167.33,1970 4199.67,1970 ; 4167.33,2131 4234.67,2131 ; 4167.33,2132 4234.67,2132 ; 4167.33,2133 4235.67,2133 ; 4167.33,2134 4235.67,2134 ; 4168.33,1964 4217.67,1964 ; 4168.33,1965 4216.67,1965 ; 4168.33,1966 4214.67,1966 ; 4168.33,2135 4235.67,2135 ; 4168.33,2136 4235.67,2136 ; 4168.33,2137 4236.67,2137 ; 4169.33,2138 4236.67,2138 ; 4169.33,2139 4236.67,2139 ; 4169.33,2140 4236.67,2140 ; 4169.33,2141 4237.67,2141 ; 4170.33,2142 4237.67,2142 ; 4170.33,2143 4237.67,2143 ; 4170.33,2144 4238.67,2144 ; 4170.33,2145 4238.67,2145 ; 4171.33,2146 4238.67,2146 ; 4171.33,2147 4238.67,2147 ; 4171.33,2148 4239.67,2148 ; 4172.33,1971 4202.67,1971 ; 4172.33,1990 4270.67,1990 ; 4172.33,1991 4270.67,1991 ; 4172.33,1992 4271.67,1992 ; 4172.33,1993 4271.67,1993 ; 4172.33,1994 4269.67,1994 ; 4172.33,1995 4268.67,1995 ; 4172.33,2149 4239.67,2149 ; 4172.33,2150 4239.67,2150 ; 4172.33,2151 4239.67,2151 ; 4172.33,2152 4240.67,2152 ; 4173.33,1986 4268.67,1986 ; 4173.33,1987 4268.67,1987 ; 4173.33,1988 4269.67,1988 ; 4173.33,1989 4269.67,1989 ; 4173.33,2153 4240.67,2153 ; 4173.33,2154 4240.67,2154 ; 4173.33,2155 4240.67,2155 ; 4173.33,2156 4241.67,2156 ; 4174.33,2157 4241.67,2157 ; 4174.33,2158 4241.67,2158 ; 4174.33,2159 4242.67,2159 ; 4174.33,2160 4242.67,2160 ; 4175.33,2161 4242.67,2161 ; 4175.33,2162 4242.67,2162 ; 4175.33,2163 4243.67,2163 ; 4176.33,1933 4190.67,1933 ; 4176.33,1934 4190.67,1934 ; 4176.33,1935 4190.67,1935 ; 4176.33,1936 4190.67,1936 ; 4176.33,1937 4215.67,1937 ; 4176.33,1938 4215.67,1938 ; 4176.33,1939 4215.67,1939 ; 4176.33,1940 4215.67,1940 ; 4176.33,1941 4215.67,1941 ; 4176.33,1942 4215.67,1942 ; 4176.33,1943 4215.67,1943 ; 4176.33,1944 4215.67,1944 ; 4176.33,1945 4215.67,1945 ; 4176.33,1946 4215.67,1946 ; 4176.33,1947 4190.67,1947 ; 4176.33,1948 4190.67,1948 ; 4176.33,1949 4190.67,1949 ; 4176.33,1950 4190.67,1950 ; 4176.33,1951 4190.67,1951 ; 4176.33,1952 4190.67,1952 ; 4176.33,1953 4190.67,1953 ; 4176.33,1954 4190.67,1954 ; 4176.33,1955 4190.67,1955 ; 4176.33,1956 4190.67,1956 ; 4176.33,1957 4190.67,1957 ; 4176.33,1958 4215.67,1958 ; 4176.33,1959 4215.67,1959 ; 4176.33,1960 4216.67,1960 ; 4176.33,1961 4217.67,1961 ; 4176.33,1962 4217.67,1962 ; 4176.33,1963 4218.67,1963 ; 4176.33,2164 4243.67,2164 ; 4176.33,2165 4243.67,2165 ; 4176.33,2166 4243.67,2166 ; 4176.33,2167 4244.67,2167 ; 4177.33,1972 4204.67,1972 ; 4177.33,2004 4190.67,2004 ; 4177.33,2005 4190.67,2005 ; 4177.33,2006 4216.67,2006 ; 4177.33,2007 4216.67,2007 ; 4177.33,2008 4216.67,2008 ; 4177.33,2009 4216.67,2009 ; 4177.33,2010 4216.67,2010 ; 4177.33,2011 4216.67,2011 ; 4177.33,2012 4216.67,2012 ; 4177.33,2013 4216.67,2013 ; 4177.33,2014 4216.67,2014 ; 4177.33,2015 4190.67,2015 ; 4177.33,2016 4190.67,2016 ; 4177.33,2017 4190.67,2017 ; 4177.33,2018 4190.67,2018 ; 4177.33,2019 4190.67,2019 ; 4177.33,2020 4190.67,2020 ; 4177.33,2021 4190.67,2021 ; 4177.33,2022 4190.67,2022 ; 4177.33,2023 4190.67,2023 ; 4177.33,2024 4216.67,2024 ; 4177.33,2025 4216.67,2025 ; 4177.33,2026 4216.67,2026 ; 4177.33,2027 4216.67,2027 ; 4177.33,2028 4217.67,2028 ; 4177.33,2029 4217.67,2029 ; 4177.33,2030 4218.67,2030 ; 4177.33,2031 4217.67,2031 ; 4177.33,2032 4215.67,2032 ; 4177.33,2033 4190.67,2033 ; 4177.33,2034 4190.67,2034 ; 4177.33,2035 4190.67,2035 ; 4177.33,2168 4244.67,2168 ; 4177.33,2169 4244.67,2169 ; 4177.33,2170 4245.67,2170 ; 4177.33,2171 4245.67,2171 ; 4178.33,2172 4245.67,2172 ; 4178.33,2173 4245.67,2173 ; 4178.33,2174 4246.67,2174 ; 4179.33,2175 4246.67,2175 ; 4179.33,2176 4246.67,2176 ; 4179.33,2177 4246.67,2177 ; 4179.33,2178 4247.67,2178 ; 4180.33,1973 4206.67,1973 ; 4180.33,2179 4247.67,2179 ; 4180.33,2180 4247.67,2180 ; 4180.33,2181 4247.67,2181 ; 4180.33,2182 4248.67,2182 ; 4181.33,2183 4248.67,2183 ; 4181.33,2184 4248.67,2184 ; 4181.33,2185 4249.67,2185 ; 4181.33,2186 4249.67,2186 ; 4182.33,2187 4249.67,2187 ; 4182.33,2188 4249.67,2188 ; 4182.33,2189 4250.67,2189 ; 4183.33,1974 4207.67,1974 ; 4183.33,2190 4250.67,2190 ; 4183.33,2191 4250.67,2191 ; 4183.33,2192 4250.67,2192 ; 4183.33,2193 4251.67,2193 ; 4184.33,2194 4251.67,2194 ; 4184.33,2195 4251.67,2195 ; 4184.33,2196 4251.67,2196 ; 4184.33,2197 4252.67,2197 ; 4185.33,2198 4252.67,2198 ; 4185.33,2199 4252.67,2199 ; 4185.33,2200 4253.67,2200 ; 4186.33,1975 4209.67,1975 ; 4186.33,2201 4253.67,2201 ; 4186.33,2202 4253.67,2202 ; 4186.33,2203 4253.67,2203 ; 4186.33,2204 4254.67,2204 ; 4187.33,2205 4254.67,2205 ; 4187.33,2206 4254.67,2206 ; 4187.33,2207 4254.67,2207 ; 4187.33,2208 4255.67,2208 ; 4188.33,1976 4210.67,1976 ; 4188.33,2209 4255.67,2209 ; 4188.33,2210 4255.67,2210 ; 4188.33,2211 4256.67,2211 ; 4188.33,2212 4256.67,2212 ; 4189.33,2213 4256.67,2213 ; 4189.33,2214 4256.67,2214 ; 4189.33,2215 4257.67,2215 ; 4190.33,1977 4212.67,1977 ; 4190.33,2216 4257.67,2216 ; 4190.33,2217 4257.67,2217 ; 4190.33,2218 4257.67,2218 ; 4190.33,2219 4258.67,2219 ; 4191.33,2220 4258.67,2220 ; 4191.33,2221 4258.67,2221 ; 4191.33,2222 4258.67,2222 ; 4191.33,2223 4259.67,2223 ; 4192.33,1978 4213.67,1978 ; 4192.33,2224 4259.67,2224 ; 4192.33,2225 4259.67,2225 ; 4192.33,2226 4260.67,2226 ; 4192.33,2227 4260.67,2227 ; 4193.33,2228 4260.67,2228 ; 4193.33,2229 4260.67,2229 ; 4193.33,2230 4261.67,2230 ; 4194.33,1979 4214.67,1979 ; 4194.33,2231 4261.67,2231 ; 4194.33,2232 4261.67,2232 ; 4194.33,2233 4261.67,2233 ; 4194.33,2234 4262.67,2234 ; 4195.33,1980 4215.67,1980 ; 4195.33,2235 4262.67,2235 ; 4195.33,2236 4262.67,2236 ; 4195.33,2237 4263.67,2237 ; 4195.33,2238 4263.67,2238 ; 4196.33,2239 4263.67,2239 ; 4196.33,2240 4263.67,2240 ; 4196.33,2241 4264.67,2241 ; 4197.33,1981 4216.67,1981 ; 4197.33,2242 4264.67,2242 ; 4197.33,2243 4264.67,2243 ; 4197.33,2244 4264.67,2244 ; 4197.33,2245 4265.67,2245 ; 4198.33,1982 4217.67,1982 ; 4198.33,2246 4265.67,2246 ; 4198.33,2247 4265.67,2247 ; 4198.33,2248 4265.67,2248 ; 4198.33,2249 4266.67,2249 ; 4199.33,1983 4218.67,1983 ; 4199.33,2250 4266.67,2250 ; 4199.33,2251 4266.67,2251 ; 4199.33,2252 4267.67,2252 ; 4199.33,2253 4267.67,2253 ; 4200.33,2254 4267.67,2254 ; 4200.33,2255 4267.67,2255 ; 4200.33,2256 4268.67,2256 ; 4201.33,1984 4219.67,1984 ; 4201.33,2257 4268.67,2257 ; 4201.33,2258 4268.67,2258 ; 4201.33,2259 4268.67,2259 ; 4201.33,2260 4269.67,2260 ; 4202.33,1933 4215.67,1933 ; 4202.33,1934 4215.67,1934 ; 4202.33,1935 4215.67,1935 ; 4202.33,1936 4215.67,1936 ; 4202.33,1947 4215.67,1947 ; 4202.33,1948 4215.67,1948 ; 4202.33,1949 4215.67,1949 ; 4202.33,1950 4215.67,1950 ; 4202.33,1951 4215.67,1951 ; 4202.33,1952 4215.67,1952 ; 4202.33,1953 4215.67,1953 ; 4202.33,1954 4215.67,1954 ; 4202.33,1955 4215.67,1955 ; 4202.33,1956 4215.67,1956 ; 4202.33,1957 4215.67,1957 ; 4202.33,1967 4212.67,1967 ; 4202.33,1968 4211.67,1968 ; 4202.33,1985 4234.67,1985 ; 4202.33,2004 4216.67,2004 ; 4202.33,2005 4216.67,2005 ; 4202.33,2015 4216.67,2015 ; 4202.33,2016 4216.67,2016 ; 4202.33,2017 4216.67,2017 ; 4202.33,2018 4216.67,2018 ; 4202.33,2019 4216.67,2019 ; 4202.33,2020 4216.67,2020 ; 4202.33,2021 4216.67,2021 ; 4202.33,2022 4216.67,2022 ; 4202.33,2023 4216.67,2023 ; 4202.33,2033 4214.67,2033 ; 4202.33,2034 4212.67,2034 ; 4202.33,2261 4269.67,2261 ; 4202.33,2262 4269.67,2262 ; 4202.33,2263 4270.67,2263 ; 4202.33,2264 4270.67,2264 ; 4203.33,1969 4209.67,1969 ; 4203.33,2035 4210.67,2035 ; 4203.33,2265 4270.67,2265 ; 4203.33,2266 4270.67,2266 ; 4203.33,2267 4271.67,2267 ; 4204.33,1970 4207.67,1970 ; 4204.33,2036 4208.67,2036 ; 4204.33,2037 4206.67,2037 ; 4204.33,2268 4271.67,2268 ; 4204.33,2269 4271.67,2269 ; 4204.33,2270 4271.67,2270 ; 4204.33,2271 4272.67,2271 ; 4205.33,1971 4205.67,1971 ; 4205.33,2272 4272.67,2272 ; 4205.33,2273 4272.67,2273 ; 4205.33,2274 4272.67,2274 ; 4205.33,2275 4508.67,2275 ; 4206.33,2276 4507.67,2276 ; 4206.33,2277 4507.67,2277 ; 4206.33,2278 4506.67,2278 ; 4206.33,2279 4506.67,2279 ; 4206.33,2280 4505.67,2280 ; 4207.33,2281 4505.67,2281 ; 4207.33,2282 4504.67,2282 ; 4207.33,2283 4503.67,2283 ; 4208.33,2284 4503.67,2284 ; 4208.33,2285 4502.67,2285 ; 4208.33,2286 4502.67,2286 ; 4208.33,2287 4501.67,2287 ; 4209.33,1996 4227.67,1996 ; 4209.33,2288 4500.67,2288 ; 4209.33,2289 4500.67,2289 ; 4209.33,2290 4499.67,2290 ; 4209.33,2291 4498.67,2291 ; 4210.33,1997 4227.67,1997 ; 4210.33,1998 4227.67,1998 ; 4210.33,2292 4498.67,2292 ; 4210.33,2293 4497.67,2293 ; 4210.33,2294 4496.67,2294 ; 4211.33,1999 4227.67,1999 ; 4211.33,2000 4228.67,2000 ; 4211.33,2001 4228.67,2001 ; 4211.33,2295 4495.67,2295 ; 4211.33,2296 4494.67,2296 ; 4211.33,2297 4494.67,2297 ; 4211.33,2298 4493.67,2298 ; 4212.33,2002 4219.67,2002 ; 4212.33,2003 4213.67,2003 ; 4212.33,2299 4492.67,2299 ; 4212.33,2300 4491.67,2300 ; 4212.33,2301 4490.67,2301 ; 4212.33,2302 4489.67,2302 ; 4213.33,2303 4488.67,2303 ; 4213.33,2304 4487.67,2304 ; 4213.33,2305 4486.67,2305 ; 4213.33,2306 4485.67,2306 ; 4214.33,2307 4484.67,2307 ; 4214.33,2308 4483.67,2308 ; 4214.33,2309 4481.67,2309 ; 4215.33,2310 4480.67,2310 ; 4215.33,2311 4479.67,2311 ; 4215.33,2312 4478.67,2312 ; 4215.33,2313 4476.67,2313 ; 4216.33,2314 4475.67,2314 ; 4216.33,2315 4474.67,2315 ; 4216.33,2316 4472.67,2316 ; 4216.33,2317 4471.67,2317 ; 4217.33,2318 4469.67,2318 ; 4217.33,2319 4467.67,2319 ; 4217.33,2320 4466.67,2320 ; 4218.33,2321 4464.67,2321 ; 4218.33,2322 4462.67,2322 ; 4218.33,2323 4460.67,2323 ; 4218.33,2324 4458.67,2324 ; 4219.33,2325 4456.67,2325 ; 4219.33,2326 4454.67,2326 ; 4219.33,2327 4451.67,2327 ; 4219.33,2328 4448.67,2328 ; 4220.33,2329 4445.67,2329 ; 4220.33,2330 4440.67,2330 ; 4220.33,2331 4434.67,2331 ; 4222.33,1984 4236.67,1984 ; 4223.33,1933 4236.67,1933 ; 4223.33,1934 4236.67,1934 ; 4223.33,1935 4236.67,1935 ; 4223.33,1936 4236.67,1936 ; 4223.33,1937 4262.67,1937 ; 4223.33,1938 4262.67,1938 ; 4223.33,1939 4262.67,1939 ; 4223.33,1940 4262.67,1940 ; 4223.33,1941 4262.67,1941 ; 4223.33,1942 4262.67,1942 ; 4223.33,1943 4262.67,1943 ; 4223.33,1944 4262.67,1944 ; 4223.33,1945 4262.67,1945 ; 4223.33,1946 4262.67,1946 ; 4223.33,1947 4236.67,1947 ; 4223.33,1948 4236.67,1948 ; 4223.33,1949 4236.67,1949 ; 4223.33,1950 4236.67,1950 ; 4223.33,1951 4236.67,1951 ; 4223.33,1952 4236.67,1952 ; 4223.33,1953 4236.67,1953 ; 4223.33,1954 4236.67,1954 ; 4223.33,1955 4236.67,1955 ; 4223.33,1956 4236.67,1956 ; 4223.33,1957 4236.67,1957 ; 4223.33,1958 4262.67,1958 ; 4223.33,1959 4262.67,1959 ; 4223.33,1960 4263.67,1960 ; 4223.33,1961 4264.67,1961 ; 4223.33,1962 4267.67,1962 ; 4223.33,1963 4268.67,1963 ; 4223.33,1964 4268.67,1964 ; 4223.33,1965 4269.67,1965 ; 4223.33,1966 4269.67,1966 ; 4223.33,1967 4236.67,1967 ; 4223.33,1968 4236.67,1968 ; 4223.33,1983 4238.67,1983 ; 4223.33,2004 4236.67,2004 ; 4223.33,2005 4236.67,2005 ; 4223.33,2006 4262.67,2006 ; 4223.33,2007 4262.67,2007 ; 4223.33,2008 4262.67,2008 ; 4223.33,2009 4262.67,2009 ; 4223.33,2010 4262.67,2010 ; 4223.33,2011 4262.67,2011 ; 4223.33,2012 4262.67,2012 ; 4223.33,2013 4262.67,2013 ; 4223.33,2014 4262.67,2014 ; 4223.33,2015 4236.67,2015 ; 4223.33,2016 4236.67,2016 ; 4223.33,2017 4236.67,2017 ; 4223.33,2018 4236.67,2018 ; 4223.33,2019 4236.67,2019 ; 4223.33,2020 4236.67,2020 ; 4223.33,2021 4236.67,2021 ; 4223.33,2022 4236.67,2022 ; 4223.33,2023 4236.67,2023 ; 4223.33,2024 4262.67,2024 ; 4223.33,2025 4263.67,2025 ; 4223.33,2026 4263.67,2026 ; 4223.33,2027 4264.67,2027 ; 4223.33,2028 4264.67,2028 ; 4223.33,2029 4265.67,2029 ; 4223.33,2030 4265.67,2030 ; 4223.33,2031 4265.67,2031 ; 4223.33,2032 4263.67,2032 ; 4223.33,2033 4236.67,2033 ; 4223.33,2034 4236.67,2034 ; 4224.33,1982 4241.67,1982 ; 4224.33,2035 4236.67,2035 ; 4225.33,1981 4244.67,1981 ; 4226.33,1980 4247.67,1980 ; 4227.33,1979 4251.67,1979 ; 4228.33,1978 4255.67,1978 ; 4229.33,1977 4261.67,1977 ; 4230.33,1976 4268.67,1976 ; 4232.33,1975 4275.67,1975 ; 4233.33,1974 4275.67,1974 ; 4235.33,1973 4274.67,1973 ; 4236.33,1972 4273.67,1972 ; 4238.33,1971 4272.67,1971 ; 4240.33,1970 4272.67,1970 ; 4240.33,2000 4250.67,2000 ; 4240.33,2001 4249.67,2001 ; 4240.33,2002 4247.67,2002 ; 4241.33,1998 4252.67,1998 ; 4241.33,1999 4251.67,1999 ; 4242.33,1969 4271.67,1969 ; 4242.33,1996 4252.67,1996 ; 4242.33,1997 4252.67,1997 ; 4242.33,2003 4246.67,2003 ; 4243.33,2004 4244.67,2004 ; 4244.33,1968 4271.67,1968 ; 4246.33,1967 4270.67,1967 ; 4248.33,2033 4261.67,2033 ; 4249.33,1933 4262.67,1933 ; 4249.33,1934 4262.67,1934 ; 4249.33,1935 4262.67,1935 ; 4249.33,1936 4262.67,1936 ; 4249.33,1947 4262.67,1947 ; 4249.33,1948 4262.67,1948 ; 4249.33,1949 4262.67,1949 ; 4249.33,1950 4262.67,1950 ; 4249.33,1951 4262.67,1951 ; 4249.33,1952 4262.67,1952 ; 4249.33,1953 4262.67,1953 ; 4249.33,1954 4262.67,1954 ; 4249.33,1955 4262.67,1955 ; 4249.33,1956 4262.67,1956 ; 4249.33,1957 4262.67,1957 ; 4249.33,2004 4262.67,2004 ; 4249.33,2005 4262.67,2005 ; 4249.33,2015 4262.67,2015 ; 4249.33,2016 4262.67,2016 ; 4249.33,2017 4262.67,2017 ; 4249.33,2018 4262.67,2018 ; 4249.33,2019 4262.67,2019 ; 4249.33,2020 4262.67,2020 ; 4249.33,2021 4262.67,2021 ; 4249.33,2022 4262.67,2022 ; 4249.33,2023 4262.67,2023 ; 4249.33,2034 4259.67,2034 ; 4250.33,2035 4257.67,2035 ; 4250.33,2036 4255.67,2036 ; 4251.33,2037 4253.67,2037 ; 4256.33,1996 4266.67,1996 ; 4256.33,1997 4265.67,1997 ; 4257.33,1998 4263.67,1998 ; 4257.33,1999 4262.67,1999 ; 4258.33,2000 4260.67,2000 ; 4258.33,2001 4259.67,2001 ; 4282.33,2172 4477.67,2172 ; 4282.33,2173 4476.67,2173 ; 4282.33,2174 4476.67,2174 ; 4283.33,2175 4475.67,2175 ; 4283.33,2176 4475.67,2176 ; 4283.33,2177 4474.67,2177 ; 4284.33,1937 4299.67,1937 ; 4284.33,1938 4301.67,1938 ; 4284.33,2178 4474.67,2178 ; 4284.33,2179 4473.67,2179 ; 4284.33,2180 4473.67,2180 ; 4284.33,2181 4472.67,2181 ; 4285.33,1935 4296.67,1935 ; 4285.33,1936 4298.67,1936 ; 4285.33,2182 4472.67,2182 ; 4285.33,2183 4471.67,2183 ; 4285.33,2184 4471.67,2184 ; 4285.33,2185 4470.67,2185 ; 4286.33,1934 4294.67,1934 ; 4286.33,1939 4302.67,1939 ; 4286.33,2186 4470.67,2186 ; 4286.33,2187 4469.67,2187 ; 4286.33,2188 4469.67,2188 ; 4286.33,2189 4468.67,2189 ; 4287.33,1933 4293.67,1933 ; 4287.33,1940 4304.67,1940 ; 4287.33,2190 4467.67,2190 ; 4287.33,2191 4526.67,2191 ; 4287.33,2192 4526.67,2192 ; 4288.33,1932 4291.67,1932 ; 4288.33,2193 4526.67,2193 ; 4288.33,2194 4527.67,2194 ; 4288.33,2195 4527.67,2195 ; 4288.33,2196 4527.67,2196 ; 4289.33,1931 4289.67,1931 ; 4289.33,1941 4305.67,1941 ; 4289.33,2197 4527.67,2197 ; 4289.33,2198 4527.67,2198 ; 4289.33,2199 4527.67,2199 ; 4289.33,2200 4527.67,2200 ; 4290.33,1942 4307.67,1942 ; 4290.33,2201 4527.67,2201 ; 4290.33,2202 4527.67,2202 ; 4290.33,2203 4527.67,2203 ; 4291.33,1943 4308.67,1943 ; 4291.33,2204 4527.67,2204 ; 4291.33,2205 4527.67,2205 ; 4291.33,2206 4527.67,2206 ; 4291.33,2207 4527.67,2207 ; 4292.33,2208 4527.67,2208 ; 4292.33,2209 4527.67,2209 ; 4292.33,2210 4527.67,2210 ; 4292.33,2211 4527.67,2211 ; 4293.33,1944 4309.67,1944 ; 4293.33,2212 4527.67,2212 ; 4293.33,2213 4527.67,2213 ; 4293.33,2214 4527.67,2214 ; 4293.33,2215 4527.67,2215 ; 4294.33,1945 4311.67,1945 ; 4294.33,2216 4527.67,2216 ; 4294.33,2217 4527.67,2217 ; 4294.33,2218 4527.67,2218 ; 4295.33,1946 4312.67,1946 ; 4295.33,2219 4527.67,2219 ; 4295.33,2220 4527.67,2220 ; 4295.33,2221 4527.67,2221 ; 4295.33,2222 4526.67,2222 ; 4296.33,1947 4313.67,1947 ; 4297.33,1948 4314.67,1948 ; 4299.33,1949 4315.67,1949 ; 4300.33,1950 4316.67,1950 ; 4301.33,1951 4317.67,1951 ; 4302.33,1952 4318.67,1952 ; 4303.33,1953 4319.67,1953 ; 4303.33,1954 4320.67,1954 ; 4304.33,1955 4321.67,1955 ; 4305.33,1956 4322.67,1956 ; 4306.33,1957 4323.67,1957 ; 4307.33,1958 4324.67,1958 ; 4308.33,1959 4324.67,1959 ; 4308.33,1960 4325.67,1960 ; 4309.33,1961 4326.67,1961 ; 4310.33,1962 4327.67,1962 ; 4311.33,1963 4327.67,1963 ; 4311.33,1964 4328.67,1964 ; 4312.33,1965 4329.67,1965 ; 4312.33,1966 4329.67,1966 ; 4313.33,1967 4330.67,1967 ; 4314.33,1968 4331.67,1968 ; 4314.33,1969 4331.67,1969 ; 4315.33,1970 4332.67,1970 ; 4315.33,1971 4332.67,1971 ; 4316.33,1972 4333.67,1972 ; 4316.33,1973 4333.67,1973 ; 4317.33,1974 4334.67,1974 ; 4317.33,1975 4334.67,1975 ; 4318.33,1976 4335.67,1976 ; 4318.33,1977 4335.67,1977 ; 4319.33,1978 4336.67,1978 ; 4319.33,1979 4336.67,1979 ; 4319.33,1980 4336.67,1980 ; 4320.33,1981 4337.67,1981 ; 4320.33,1982 4337.67,1982 ; 4320.33,1983 4337.67,1983 ; 4321.33,1984 4338.67,1984 ; 4321.33,1985 4338.67,1985 ; 4321.33,1986 4350.67,1986 ; 4322.33,1987 4350.67,1987 ; 4322.33,1988 4349.67,1988 ; 4322.33,1989 4349.67,1989 ; 4322.33,1990 4348.67,1990 ; 4323.33,1991 4348.67,1991 ; 4323.33,1992 4347.67,1992 ; 4323.33,1993 4347.67,1993 ; 4323.33,1994 4346.67,1994 ; 4323.33,1995 4346.67,1995 ; 4323.33,1996 4345.67,1996 ; 4324.33,1997 4345.67,1997 ; 4324.33,1998 4344.67,1998 ; 4324.33,1999 4344.67,1999 ; 4324.33,2000 4343.67,2000 ; 4324.33,2001 4343.67,2001 ; 4324.33,2002 4343.67,2002 ; 4324.33,2003 4342.67,2003 ; 4324.33,2004 4342.67,2004 ; 4325.33,2005 4342.67,2005 ; 4325.33,2006 4342.67,2006 ; 4325.33,2007 4342.67,2007 ; 4325.33,2008 4342.67,2008 ; 4325.33,2009 4342.67,2009 ; 4325.33,2010 4342.67,2010 ; 4325.33,2011 4342.67,2011 ; 4325.33,2012 4342.67,2012 ; 4325.33,2013 4342.67,2013 ; 4325.33,2014 4342.67,2014 ; 4325.33,2015 4342.67,2015 ; 4325.33,2016 4342.67,2016 ; 4325.33,2017 4342.67,2017 ; 4325.33,2018 4342.67,2018 ; 4325.33,2019 4342.67,2019 ; 4325.33,2020 4342.67,2020 ; 4325.33,2021 4342.67,2021 ; 4325.33,2022 4342.67,2022 ; 4325.33,2023 4342.67,2023 ; 4325.33,2024 4342.67,2024 ; 4325.33,2025 4342.67,2025 ; 4325.33,2026 4342.67,2026 ; 4325.33,2027 4342.67,2027 ; 4325.33,2028 4342.67,2028 ; 4325.33,2029 4342.67,2029 ; 4325.33,2030 4342.67,2030 ; 4325.33,2031 4342.67,2031 ; 4325.33,2032 4342.67,2032 ; 4340.33,1983 4352.67,1983 ; 4340.33,1984 4352.67,1984 ; 4340.33,1985 4351.67,1985 ; 4341.33,1981 4354.67,1981 ; 4341.33,1982 4353.67,1982 ; 4342.33,1978 4356.67,1978 ; 4342.33,1979 4355.67,1979 ; 4342.33,1980 4354.67,1980 ; 4343.33,1976 4357.67,1976 ; 4343.33,1977 4356.67,1977 ; 4344.33,1973 4360.67,1973 ; 4344.33,1974 4359.67,1974 ; 4344.33,1975 4358.67,1975 ; 4345.33,1971 4361.67,1971 ; 4345.33,1972 4360.67,1972 ; 4346.33,1969 4363.67,1969 ; 4346.33,1970 4362.67,1970 ; 4347.33,1967 4365.67,1967 ; 4347.33,1968 4364.67,1968 ; 4348.33,1965 4367.67,1965 ; 4348.33,1966 4366.67,1966 ; 4349.33,1963 4369.67,1963 ; 4349.33,1964 4368.67,1964 ; 4350.33,1962 4370.67,1962 ; 4351.33,1960 4373.67,1960 ; 4351.33,1961 4371.67,1961 ; 4352.33,1958 4375.67,1958 ; 4352.33,1959 4374.67,1959 ; 4353.33,1957 4376.67,1957 ; 4354.33,1955 4379.67,1955 ; 4354.33,1956 4378.67,1956 ; 4355.33,1954 4381.67,1954 ; 4356.33,1952 4384.67,1952 ; 4356.33,1953 4382.67,1953 ; 4357.33,1951 4385.67,1951 ; 4358.33,1949 4389.67,1949 ; 4358.33,1950 4387.67,1950 ; 4359.33,1948 4390.67,1948 ; 4360.33,1947 4390.67,1947 ; 4361.33,1945 4387.67,1945 ; 4361.33,1946 4389.67,1946 ; 4362.33,1944 4386.67,1944 ; 4363.33,1943 4385.67,1943 ; 4364.33,1942 4383.67,1942 ; 4365.33,1941 4382.67,1941 ; 4366.33,1940 4381.67,1940 ; 4367.33,1938 4379.67,1938 ; 4367.33,1939 4380.67,1939 ; 4368.33,1937 4378.67,1937 ; 4369.33,1936 4377.67,1936 ; 4370.33,1935 4376.67,1935 ; 4371.33,1934 4375.67,1934 ; 4372.33,1933 4374.67,1933 ; 4373.33,1932 4373.67,1932 ; 4381.33,2171 4477.67,2171 ; 4384.33,2170 4477.67,2170 ; 4386.33,2169 4478.67,2169 ; 4387.33,2168 4478.67,2168 ; 4388.33,2167 4479.67,2167 ; 4389.33,2165 4479.67,2165 ; 4389.33,2166 4479.67,2166 ; 4390.33,2164 4480.67,2164 ; 4391.33,2162 4481.67,2162 ; 4391.33,2163 4480.67,2163 ; 4392.33,2160 4481.67,2160 ; 4392.33,2161 4481.67,2161 ; 4393.33,2157 4482.67,2157 ; 4393.33,2158 4482.67,2158 ; 4393.33,2159 4482.67,2159 ; 4394.33,2154 4483.67,2154 ; 4394.33,2155 4483.67,2155 ; 4394.33,2156 4483.67,2156 ; 4395.33,2151 4484.67,2151 ; 4395.33,2152 4484.67,2152 ; 4395.33,2153 4484.67,2153 ; 4396.33,2149 4485.67,2149 ; 4396.33,2150 4485.67,2150 ; 4397.33,2146 4486.67,2146 ; 4397.33,2147 4486.67,2147 ; 4397.33,2148 4485.67,2148 ; 4398.33,2144 4486.67,2144 ; 4398.33,2145 4486.67,2145 ; 4399.33,2142 4487.67,2142 ; 4399.33,2143 4487.67,2143 ; 4400.33,2139 4488.67,2139 ; 4400.33,2140 4487.67,2140 ; 4400.33,2141 4487.67,2141 ; 4401.33,2137 4488.67,2137 ; 4401.33,2138 4488.67,2138 ; 4402.33,2135 4489.67,2135 ; 4402.33,2136 4489.67,2136 ; 4403.33,2133 4489.67,2133 ; 4403.33,2134 4489.67,2134 ; 4404.33,2131 4490.67,2131 ; 4404.33,2132 4489.67,2132 ; 4404.33,2274 4509.67,2274 ; 4405.33,2126 4491.67,2126 ; 4405.33,2127 4491.67,2127 ; 4405.33,2128 4490.67,2128 ; 4405.33,2129 4490.67,2129 ; 4405.33,2130 4490.67,2130 ; 4406.33,2119 4492.67,2119 ; 4406.33,2120 4492.67,2120 ; 4406.33,2121 4492.67,2121 ; 4406.33,2122 4492.67,2122 ; 4406.33,2123 4491.67,2123 ; 4406.33,2124 4491.67,2124 ; 4406.33,2125 4491.67,2125 ; 4406.33,2273 4509.67,2273 ; 4407.33,2110 4493.67,2110